# Altium PCB DSS2_CAN.PcbDoc
Units mil, origin at the board's own origin, x right, y up, seen from the top; angles counter-clockwise.
Board outline 3937.01 x 3149.61 mil, 2 copper layers (Top Layer, Bottom Layer), stack 61.811 mil thick; 30 components, 19 nets, 125 pads, 15 vias.
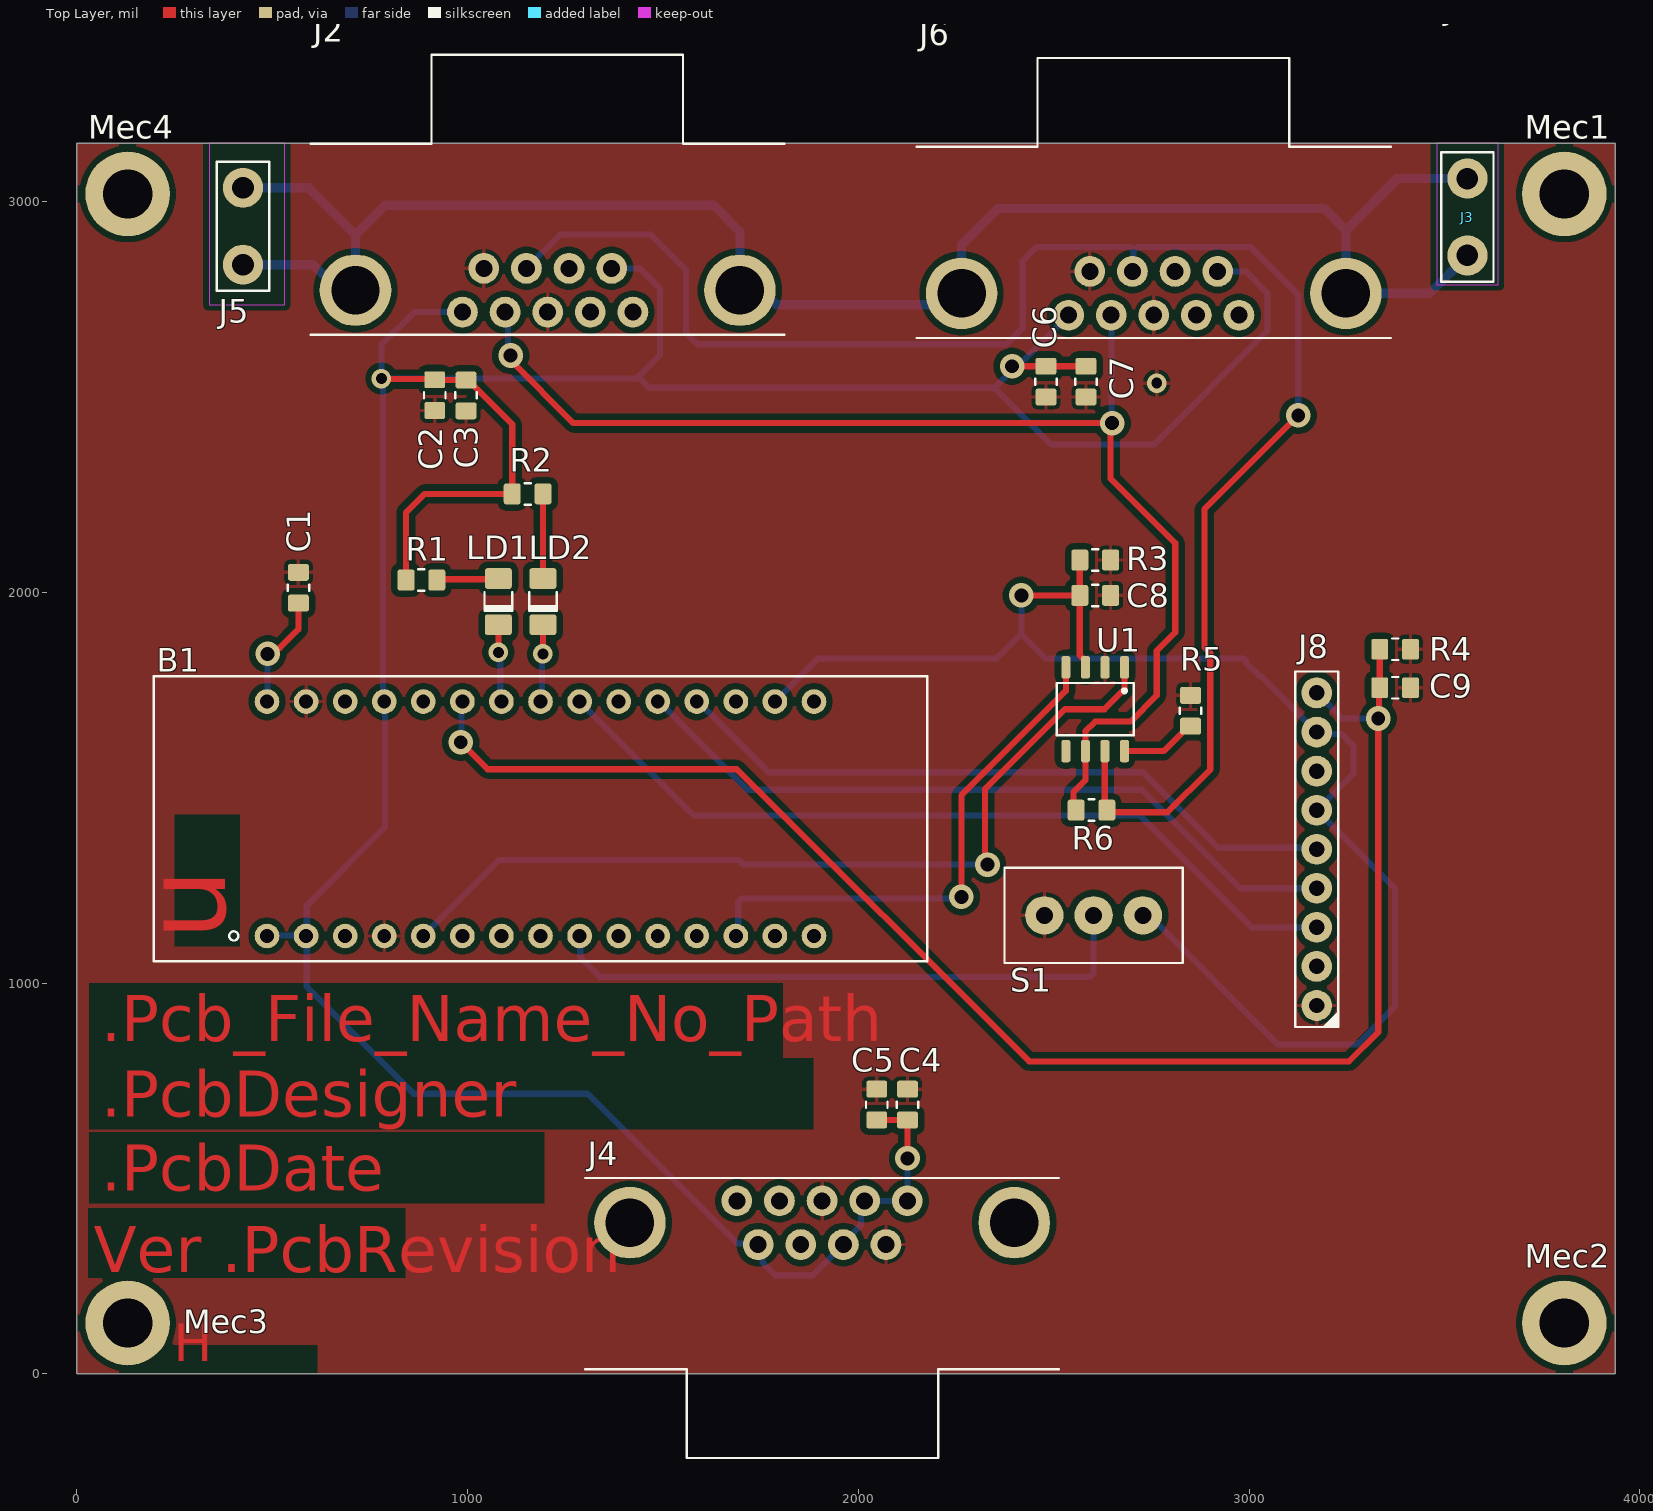
[diagram p0: Top Layer view]
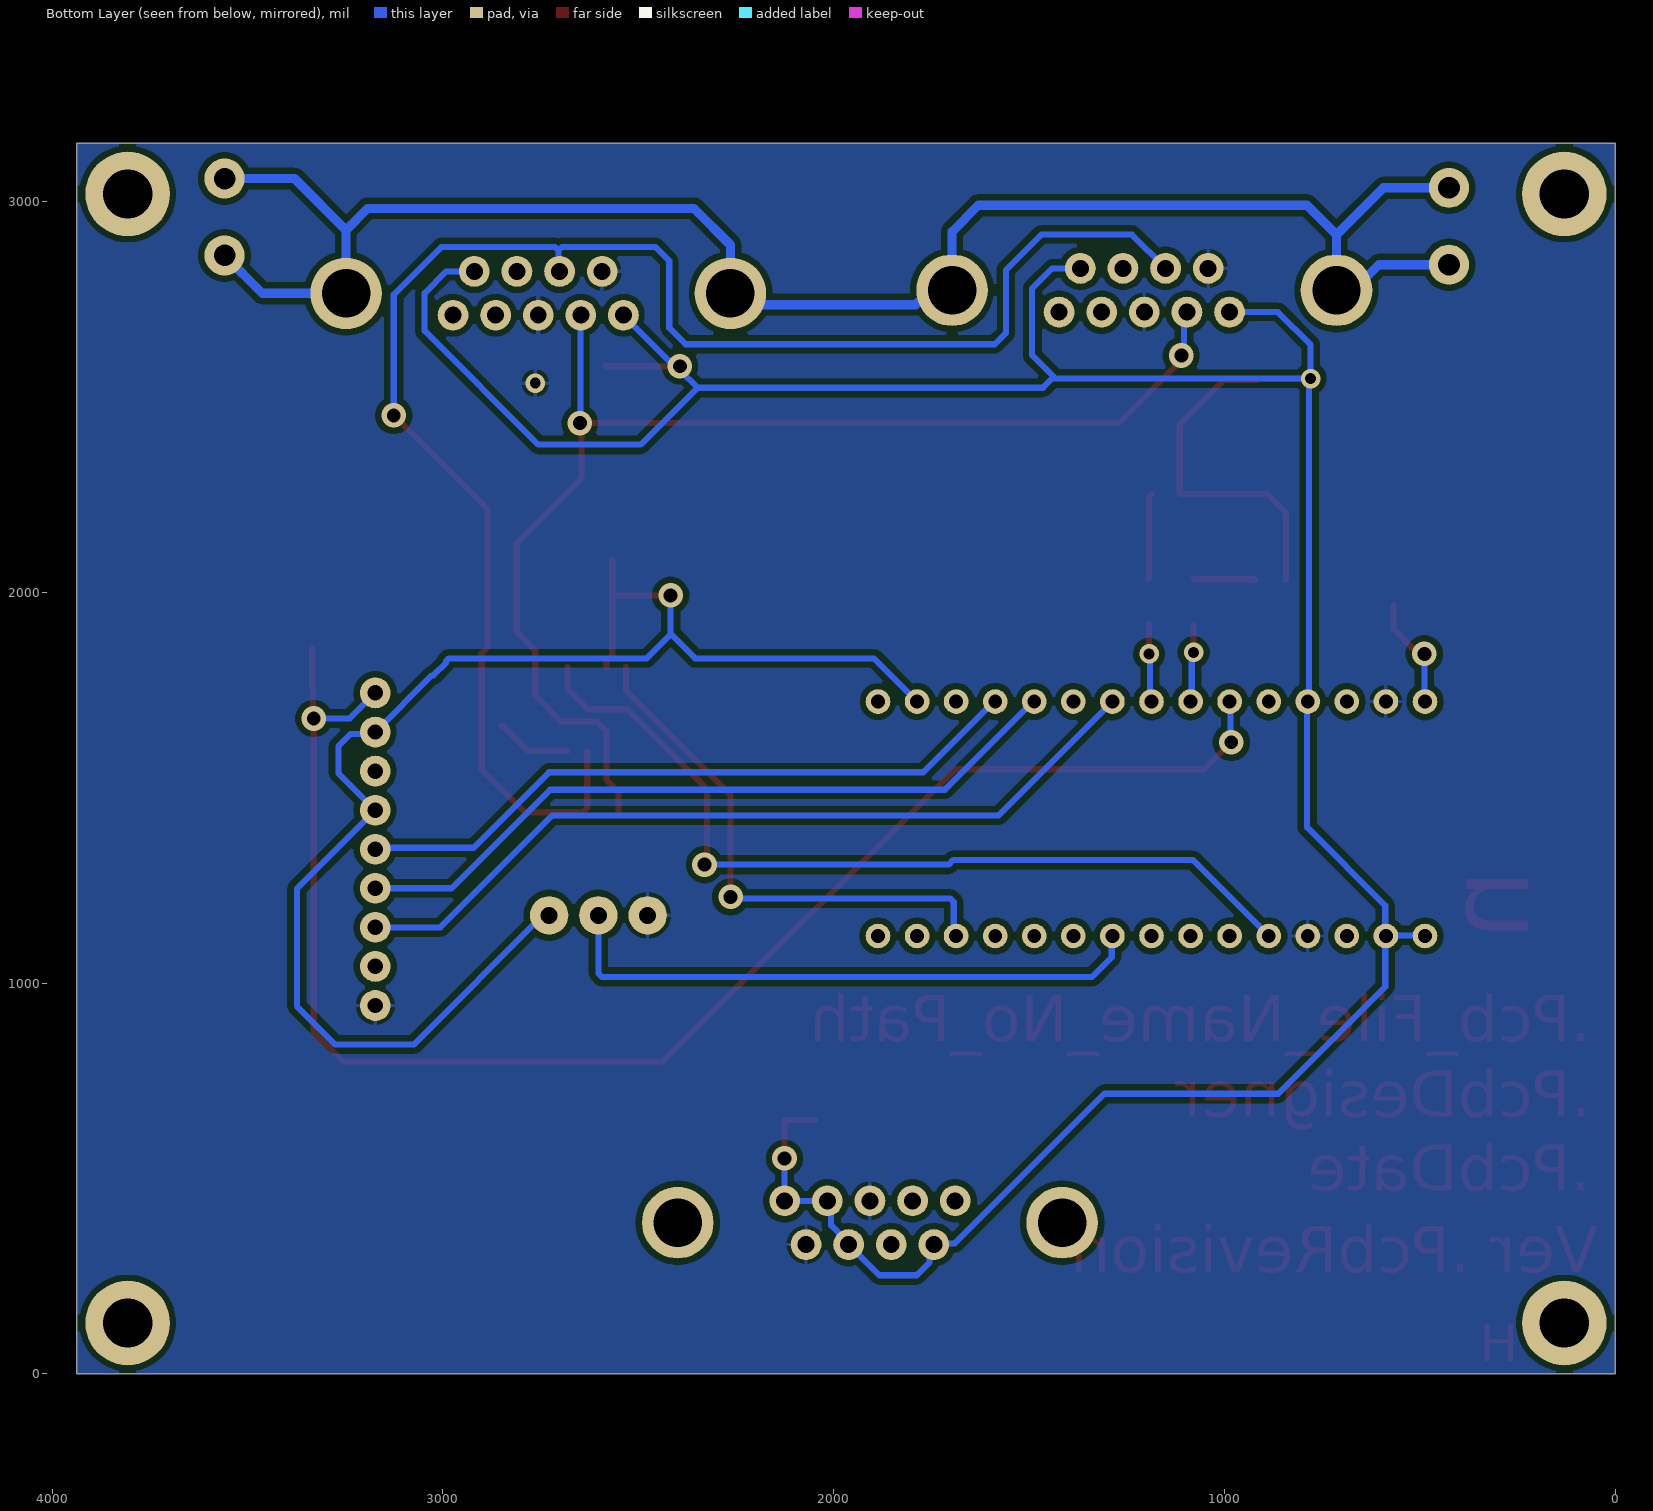
[diagram p1: Bottom Layer view, seen from below]

## Layer stack, top to bottom
Top Layer: signal copper 1.378
Dielectric 1: core 59.0551, FR-4, Dk 4.2
Bottom Layer: signal copper 1.378

## Board outline
0,0 0,3149.61 3937.01,3149.61 3937.01,0

## Design rules (kind name [scope] priority, off if disabled: settings)
AcuteAngle [All] p1: minimum=9.00000000000000E+0001 checktracksonly=TRUE
AssemblyTestPointUsage [All] p1 off:
AssemblyTestpoint [All] p1 off: testpointundercomponent=TRUE minsize=40 maxsize=100 preferedsize=60 minholesize=0 maxholesize=40 preferedholesize=32 testpointgrid=1 usegrid=TRUE gridtolerance=0.01 allowsidetop=TRUE allowsidebottom=TRUE
BoardOutlineClearance [All] p1 off: gap=9.84 ignorepadtopadclearanceinfootprint=FALSE
Clearance [All] p1: gap=15.75 ignorepadtopadclearanceinfootprint=FALSE
ComponentClearance [All] p1 off: gap=9.84 collisioncheckmode=3 verticalgap=9.84 showdistances=FALSE
DiffPairsRouting [All] p1 off: maxlimit=10 minlimit=10 mostfreqgap=10 toplayer_minwidth=15 toplayer_maxwidth=15 toplayer_prefwidth=15 bottomlayer_minwidth=15 bottomlayer_maxwidth=15 bottomlayer_prefwidth=15 maxuncoupledlength=500
FabricationTestPointUsage [All] p1 off: valid=0 allowmultiple=FALSE
FabricationTestpoint [All] p1 off: side=3 testpointundercomponent=TRUE minsize=40 maxsize=100 preferedsize=60 minholesize=0 maxholesize=40 preferedholesize=32 testpointgrid=1 allowsidetop=TRUE allowsidebottom=TRUE usegrid=TRUE gridtolerance=0.01
FanoutControl Fanout_BGA [IsBGA] p1 off: bgadir=Out bgaviamode=Centered fanoutstyle=Auto fanoutdirection=Alternating viagrid=1 // Fanout_BGA (Default Rule)
FanoutControl Fanout_LCC [IsLCC] p2 off: bgadir=Out bgaviamode=Centered fanoutstyle=Auto fanoutdirection=Alternating viagrid=1 // Fanout_LCC (Default Rule)
FanoutControl Fanout_SOIC [IsSOIC] p3 off: bgadir=Out bgaviamode=Centered fanoutstyle=Auto fanoutdirection=Alternating viagrid=1 // Fanout_SOIC (Default Rule)
FanoutControl Fanout_Small [(CompPinCount < 5)] p4 off: bgadir=Out bgaviamode=Centered fanoutstyle=Auto fanoutdirection=OutThenIn viagrid=1 // Fanout_Small (Default Rule)
FanoutControl Fanout_Default [All] p5 off: bgadir=Out bgaviamode=Centered fanoutstyle=Auto fanoutdirection=Alternating viagrid=1 // Fanout_Default (Default Rule)
Height [All] p1 off: minheight=0 maxheight=1000 prefheight=500
HoleSize [All] p1 off: absolutevalues=TRUE maxlimit=118.11 minlimit=5.91 maxpercent=80.000 minpercent=20.000
HoleToHoleClearance [All] p1 off: gap=9.84 allowstackedmicrovias=TRUE
LayerPairs [All] p1 off: enforce=TRUE
MinimumAnnularRing [All] p1 off: minimumring=13.78
MinimumSolderMaskSliver [All] p1 off: minsoldermaskwidth=0
PasteMaskExpansion [All] p1 off: expansion=0
PlaneClearance [All] p1: clearance=9.84
PlaneConnect [All] p1 off: planeconnectstyle=Relief reliefexpansion=19.68 reliefentries=4 reliefconductorwidth=9.84 reliefairgap=9.84
PolygonConnect [All] p1: connectstyle=Relief reliefconductorwidth=9.84 reliefentries=4 polygonreliefangle="90 Angle" airgapwidth=9.84
RoutingCorners [All] p1 off: cornerstyle=45-Degree minsetback=98.43 maxsetback=98.43
RoutingLayers [All] p1 off: top layer_v5=TRUE bottom layer_v5=TRUE
RoutingPriority [All] p1 off: routingpriority=0
RoutingTopology [All] p1 off: topology=Shortest
RoutingVias [All] p1: holewidth=35.43 width=62.99 viastyle="Through Hole" minholewidth=35.43 minwidth=62.99 maxholewidth=35.43 maxwidth=62.99
SilkToBoardRegionClearance [All] p1 off:
SilkToSilkClearance [All] p1 off: silktosilkclearance=0
SilkToSolderMaskClearance [IsPad] p1 off: minsilkscreentomaskgap=0 clearancetoexposedcopper=TRUE
SolderMaskExpansion [All] p1 off: expansion=0 istentingtop=FALSE
Width [All] p1: maxlimit=157.48 minlimit=7.87 preferedwidth=15.75
4 further rules are at their usual default settings.

## Components (designator, comment, footprint, x,y, rotation, side; value= is the part's Value field where it differs from the comment)
B1 "NUCLEO-L432KC Socket" "NUCLEO-L432KC Socket" 1886.61,1120.47 r90 top
C1 "100nF" "CAPACITOR 2012 REFLOW" 566.93,2011.81 r90 top
C2 "10uF" "CAPACITOR 2012 REFLOW" 915.75,2504.72 r90 top
C3 "100nF" "CAPACITOR 2012 REFLOW" 996.06,2503.94 r90 top
C4 "10uF" "CAPACITOR 2012 REFLOW" 2125.98,688.98 r270 top
C5 "100nF" "CAPACITOR 2012 REFLOW" 2047.24,688.98 r270 top
C6 "10uF" "CAPACITOR 2012 REFLOW" 2480.32,2539.37 r90 top
C7 "100nF" "CAPACITOR 2012 REFLOW" 2582.68,2539.37 r90 top
C8 "100nF" "CAPACITOR 2012 REFLOW" 2606.3,1992.13 r0 top
C9 "100nF" "CAPACITOR 2012 REFLOW" 3374.02,1755.91 r180 top
J2 "*" "D-SUB 9 FEM RND 205-00769" 1205.04,2773.2 r90 top
J3 "3867B.68" "FASTON 6.3mm P5.0" 3559.06,2960.63 r270 top
J4 "*" "D-SUB 9 FEM RND 205-00769" 1907.28,386.61 r270 top
J5 "3867B.68" "FASTON 6.3mm P5.0" 425.2,2937.01 r270 top
J6 "*" "D-SUB 9 FEM RND 205-00769" 2756.23,2765.33 r90 top
J8 "*" "PinHeader1x9 P2.54" 3173.23,1342.52 r90 top
LD1 "*" "LED 3216 REFLOW" 1078.74,1976.38 r90 top
LD2 "*" "LED 3216 REFLOW" 1192.91,1976.38 r90 top
Mec1 "*" "Screw M3X5 Connected" 3807.09,3019.68 r0 top
Mec2 "*" "Screw M3X5 Connected" 3807.09,129.92 r0 top
Mec3 "*" "Screw M3X5 Connected" 129.92,129.92 r0 top
Mec4 "*" "Screw M3X5 Connected" 129.92,3019.68 r0 top
R1 "100R" "RESISTOR 2012 REFLOW" 881.89,2031.5 r180 top
R2 "100R" "RESISTOR 2012 REFLOW" 1153.54,2251.97 r180 top
R3 "100k" "RESISTOR 2012 REFLOW" 2606.3,2082.68 r180 top
R4 "100k" "RESISTOR 2012 REFLOW" 3374.02,1854.33 r180 top
R5 "0R" "RESISTOR 2012 REFLOW" 2850.39,1696.85 r270 top
R6 "NC(120)" "RESISTOR 2012 REFLOW" 2596.8,1442.57 r0 top
S1 "*" "SLIDE SWITCH Knitter MFP120" 2602.36,1173.23 r180 top
U1 "MAX3051ESA" "SO8 P1.27 C4.0X5.0 H1.75" 2606.3,1700.79 r270 top

## Footprints (in the part's own frame and the unit in brackets; to place one, negate y for a bottom-side part, rotate by r counter-clockwise, add the part's x,y. Pads: shape width x height; smd on the part's side, far side on the other; paste and mask are expansions set on the pad)
"CAPACITOR 2012 REFLOW" [mm] "Capacitor SMD 2.0x1.2mm (0805-imperial)"
  rrect25% 1.1x1.35 smd: 1(-1,0) 2(1,0)
  silkscreen extent -0.2,-0.7 0.2,0.7, body extent -1,-0.6 1,0.6, height 1
"D-SUB 9 FEM RND 205-00769" [mm] "RND 205-00769"
  round 2 hole 1.1: 1(-1.42,5.54) 2(-1.42,2.77) 3(-1.42,0) 4(-1.42,-2.77) 5(-1.42,-5.54) 6(1.42,4.155) 7(1.42,1.385) 8(1.42,-1.385) 9(1.42,-4.155)
  round 4.65 hole 3.15: 10(0,12.495) 11(0,-12.495)
  silkscreen extent -2.9,-15.4 15.3,15.4, body extent -2.9,-15.39 15.3,15.41, height 12.69
"FASTON 6.3mm P5.0" [mm] "Faston Vogt 3867B.68 6.3mm P5.0"
  round 2.6 hole 1.4: 1(-2.5,0) 1(2.5,0)
  silkscreen extent -4.2,-1.7 4.2,1.7, body extent -12.1,-0.4 4,0.4, height 9
"LED 3216 REFLOW" [mm] "LED SMD 3.2x1.6mm (1206-imperial)"
  rrect25% 1.35x1.75 smd: 1(-1.5,0) 2(1.5,0)
  silkscreen extent -0.6,-0.9 0.6,0.9, body extent -1.7,-0.9 1.7,0.9, height 1.1
"NUCLEO-L432KC Socket" [mm] "ARM Cortex based board"
  round 1.6 hole 0.9: 1(0,35.56) 2(0,33.02) 3(0,30.48) 4(0,27.94) 5(0,25.4) 6(0,22.86) 7(0,20.32) 8(0,17.78) 9(0,15.24) 10(0,12.7) 11(0,10.16) 12(0,7.62) 13(0,5.08) 14(0,2.54) 15(0,0) 16(15.24,0) 17(15.24,2.54) 18(15.24,5.08) 19(15.24,7.62) 20(15.24,10.16) 21(15.24,12.7) 22(15.24,15.24) 23(15.24,17.78) 24(15.24,20.32) 25(15.24,22.86) 26(15.24,25.4) 27(15.24,27.94) 28(15.24,30.48) 29(15.24,33.02) 30(15.24,35.56)
  silkscreen extent -1.65,-7.37 16.89,42.93, body extent -1.27,-1.27 16.51,36.83, height 7.01
"PinHeader1x9 P2.54" [mm] "Plug connector"
  round 2 hole 1: 1(-10.16,0) 2(-7.62,0) 3(-5.08,0) 4(-2.54,0) 5(0,0) 6(2.54,0) 7(5.08,0) 8(7.62,0) 9(10.16,0)
  silkscreen extent -11.56,-1.4 11.56,1.4, body extent -11.43,-1.27 11.43,1.27, height 8.5
"RESISTOR 2012 REFLOW" [mm] "Resistor SMD 2.0x1.2mm (0805-imperial)"
  rrect25% 1.1x1.35 smd: 1(-1,0) 2(1,0)
  silkscreen extent -0.2,-0.7 0.2,0.7, body extent -1,-0.63 1,0.63, height 0.45
"Screw M3X5 Connected" [mm] "Standard Screw M3X5 Connected BN330"
  round 5.5 hole 3.2 paste-2539.97 mask+0: 1(0,0)
  body extent -2.75,-2.75 2.75,2.75, height 2.02
"SLIDE SWITCH Knitter MFP120" [mm] "Slide Switch Knitter-Switch type MFP120"
  round 2.5 hole 1.1: 1(-3.2,0) 2(0,0) 3(3.2,0)
  silkscreen extent -5.8,-3.1 5.8,3.1, body extent -5.5,-2.8 5.5,2.8, height 10
"SO8 P1.27 C4.0X5.0 H1.75" [mm] "8-Pin Small Outline Integrated Circuit 1.27 mm Pitch, IPC Medium Density"
  rrect50% 1.45x0.6 smd: 1(-2.725,1.905) 2(-2.725,0.635) 3(-2.725,-0.635) 4(-2.725,-1.905) 5(2.725,-1.905) 6(2.725,-0.635) 7(2.725,0.635) 8(2.725,1.905)
  silkscreen extent -1.7,-2.5 1.7,2.5, body extent -3,-2.45 3,2.45, height 1.75

## Part data
B1: "ARM Cortex based board"
C1 C2 C3 C4 C5 C6 C7 C8 C9: library part Capacitor, "Capacitor"
J2 J4 J6: library part "D-SUB 9 FEM GROUNDED", "D-Subminiature 9 way Socket Right Angle"
J3 J5: library part "FASTON 6.3mm P5.0", "Faston Right angle Vogt 3867B.68"
J8: library part PinHeader1x9, "Plug connector"
LD1 LD2: library part LED, "LED generic"
Mec1 Mec2 Mec3 Mec4: library part "Screw Connected", "Screw Connected BN330"
R1 R2 R3 R4 R5 R6: library part Resistor, "Resistor"
S1: library part "Slide Switch 1Pole ON-ON", "Slide Switch 1Pole ON-ON"
U1: "+3.3V, 1Mbps, Low-Supply-Current CAN Transceiver"

## Via types
v1: diameter 62.99, hole 35.43, Top Layer to Bottom Layer, 11 vias
v2: diameter 50, hole 28, Top Layer to Bottom Layer, 4 vias

## Nets (pads, with @x,y where several pads share a name; then routed paths per layer and width w, separated by ;. In a path a pad name is that pad's centre, name@x,y a point inside that pad or via, vN(x,y) a via of type N, cw(c..) or ccw(c..) an arc to the next point about the centre after c; other vN are vias at no path point)
+3V3: B1.17 C8.1 J8.6 J8.8 R3.2 S1.1 U1.3 | length 3811.9
  Top Layer w15.75: v1(2417.32,1992.13) C8.1 ; R3.2 C8.1 ; U1.3 2581.3,1824.8 2566.93,1839.17 C8.1
  Bottom Layer w15.75: B1.17@1788.19,1722.05 1896.85,1830.71 2354.33,1830.71 2415.9,1892.27 2417.32,1892.27 ; v1(2417.32,1992.13) 2417.32,1892.27 ; S1.1 2744.09,1173.23 3074.8,842.52 3275.59,842.52 3374.02,940.94 3374.02,1241.73 J8.6 3267.72,1537.01 3267.72,1606.3 3236.22,1637.8 3177.95,1637.8 J8.8 3028.35,1787.4 3024.41,1787.4 2992.13,1819.69 2992.13,1823.62 2985.04,1830.71 2478.89,1830.71 2417.32,1892.27
CANH: J2.7 J6.7 R6.2 U1.7 | length 4327.9
  Top Layer w15.75: U1.7@2632.58,1592.22 U1.7 2630.61,1592.81 2630.61,1448.13 2641.73,1437.01 2791.34,1437.01 2900.59,1546.26 2900.59,1844.49 2885.83,1859.25 2885.83,2212.6 v1(3125.98,2452.76)
  Bottom Layer w15.75: J2.7 1237.13,2915.72 1468.23,2915.72 1558.78,2825.17 1558.78,2663.76 1587.6,2634.94 2379.03,2634.94 2420.99,2676.89 2420.99,2848.8 2456.42,2884.23 2695.23,2884.23 2704.45,2875 ; J6.7 2704.45,2823.99 2704.45,2875 ; v1(3125.98,2452.76) 3125.98,2761.91 3003.67,2884.23 2713.68,2884.23 2704.45,2875
CANL: J2.2 J6.2 R6.1 U1.6 | length 3239.7
  Top Layer w15.75: v1(1110.24,2606.3) 1110.24,2593.51 1270.68,2433.07 v1(2649.61,2433.07) 2645.67,2429.13 2645.67,2291.34 2811.02,2125.98 2811.02,1897.64 2763.78,1850.39 2763.78,1736.22 2696.85,1669.29 2606.3,1669.29 2581.3,1644.29 U1.6 2581.3,1519.49 2551.18,1489.37 R6.1@2551.18,1437.01
  Bottom Layer w15.75: J2.2 1103.11,2710.18 1103.11,2613.42 v1(1110.24,2606.3) ; J6.2 2648.39,2708.21 2648.39,2434.29 v1(2649.61,2433.07)
CHG_BUTTON: B1.9 S1.2 | length 1552.8
  Bottom Layer w15.75: B1.9@1288.19,1122.05 1288.19,1066.14 1338.58,1015.75 2593.14,1015.75 2602.37,1024.98 2602.37,1149.6 2590.55,1161.42 S1.2
EARTH: J2.10 J2.11 J3.1 J5.1 J6.10 J6.11 | length 4630
  Bottom Layer w23.62: J5.1@425.2,2838.58 604.59,2838.58 669.97,2773.2 J2.10 713.12,2915.19 ; J5.1@425.2,3035.43 592.87,3035.43 713.12,2915.19 ; J3.1@3559.06,2862.2 3462.18,2765.33 J6.11 3248.15,2927.14 ; J3.1@3559.06,3059.06 3380.07,3059.06 3248.15,2927.14 ; 713.12,2915.19 788.45,2990.53 1629.65,2990.53 1696.97,2923.21 J2.11 1727.48,2742.7 1784.06,2742.7 1790.54,2736.22 2235.19,2736.22 J6.10 2264.3,2888.95 2358,2982.65 3192.64,2982.65 3248.15,2927.14
GEAR_SEL: B1.22 J8.3 | length 2126
  Bottom Layer w15.75: B1.22 1577.95,1429.13 2720.47,1429.13 3007.09,1142.52 J8.3
GND: B1.4 B1.29 C1.2 C2.1 C3.1 C4.1 C5.1 C6.1 C7.1 C8.2 C9.1 J2.3 J2.6 J4.3 J4.6 J6.3 J6.6 J8.1 R3.1 R4.1 R5.1 S1.3 U1.2
  other v2: 2763.78,2535.43
NetB1_23: B1.23 LD2.1 | length 197.2
  Top Layer w15.75: v2(1192.91,1842.52) LD2.1
  Bottom Layer w15.75: B1.23@1188.19,1722.05 1190.55,1724.41 1190.55,1840.16 v2(1192.91,1842.52)
NetB1_24: B1.24 LD1.1 | length 199.2
  Top Layer w15.75: v2(1078.74,1846.46) LD1.1
  Bottom Layer w15.75: v2(1078.74,1846.46) 1083.46,1841.73 1083.46,1726.77 B1.24@1088.19,1722.05
NetB1_30: B1.30 C1.1 | length 288.3
  Top Layer w15.75: v1(488.19,1842.52) 500.97,1842.52 516.33,1857.87 519.29,1857.87 566.93,1905.51 C1.1@566.93,1968.5
  Bottom Layer w15.75: B1.30@488.19,1722.05 v1(488.19,1842.52)
NetLD1_2: LD1.2 R1.1 | length 159.1
  Top Layer w15.75: R1.1 923.23,2033.47 1076.77,2033.47 LD1.2
NetLD2_2: LD2.2 R2.1 | length 222.6
  Top Layer w15.75: R2.1@1185.04,2251.97 1192.91,2244.1 LD2.2 LD2.2@1194.88,2037.4
NetR5_2: R5.2 U1.8 | length 195.6
  Top Layer w15.75: U1.8 2781.5,1593.5 2845.47,1657.48 R5.2
P_BUTTON: B1.25 C9.2 J8.9 R4.2 | length 3990.4
  Top Layer w15.75: v1(982.28,1616.14) 1051.18,1547.24 1688.98,1547.24 2437.01,799.21 3255.91,799.21 3330.71,874.02 v1(3330.71,1677.17) 3332.68,1679.13 3332.68,1753.94 C9.2 R4.2
  Bottom Layer w15.75: v1(982.28,1616.14) 984.45,1618.31 984.45,1718.31 B1.25 ; J8.9 3238.58,1677.17 v1(3330.71,1677.17)
RXD: B1.13 U1.4 | length 1361.9
  Top Layer w15.75: v1(2263.78,1220.47) 2263.78,1480.31 2531.3,1747.83 U1.4
  Bottom Layer w15.75: B1.13@1688.19,1122.05 1692.91,1126.77 1692.91,1207.31 1702.14,1216.54 2259.84,1216.54 v1(2263.78,1220.47)
SCL: B1.1 B1.2 B1.27 C2.2 C3.2 C4.2 C5.2 C6.2 C7.2 J2.1 J2.9 J4.1 J4.2 J4.7 J4.9 J6.1 J6.9 R1.2 R2.2 | length 8916.2
  Top Layer w15.75: v2(779.53,2547.24) 781.11,2545.67 914.17,2545.67 C2.2 916.14,2543.7 1000.59,2543.7 1114.17,2430.12 R2.2 889.76,2251.97 842.52,2204.72 R1.2 ; C5.2 C4.2 v1(2125.98,551.18) ; v1(2393.7,2578.74) C6.2 C7.2
  Bottom Layer w15.75: B1.1@488.19,1122.05 B1.2@588.19,1122.05 ; J2.1 862.97,2717.3 779.53,2633.86 v2(779.53,2547.24) ; J2.9 1440.69,2829.11 1492.13,2777.68 1492.13,2606.3 1437.01,2551.18 1464.57,2523.62 2348.37,2523.62 ; 1440.94,2547.24 v2(779.53,2547.24) ; v1(2125.98,551.18) 2125.69,550.89 2125.69,442.82 J4.1 J4.2 2006.49,432.68 2006.49,379.53 1961.81,334.84 J4.7 1883.07,251.97 1787.4,251.97 1754.98,284.39 1754.98,319.43 J4.9 1740.72,333.69 1689.93,333.69 1307.09,716.54 862.2,716.54 588.19,990.55 B1.2@588.19,1122.05 ; v1@2393.7,2568.95 2348.37,2523.62 ; v1(2393.7,2578.74) 2402.74,2587.78 2416.47,2587.78 J6.1 ; J6.9 2991.86,2821.24 3046.97,2766.12 3046.97,2669.02 2755.91,2377.95 2494.04,2377.95 2348.37,2523.62 ; B1.2@588.19,1122.05 588.19,1198.43 788.19,1398.43 788.19,1720.47 783.07,1725.59 783.07,2543.7 v2(779.53,2547.24)
TXD: B1.5 U1.1 | length 2242.4
  Top Layer w15.75: v1(2330.71,1303.15) 2323.88,1309.98 2323.88,1495.88 2528.79,1700.79 2629.92,1700.79 2681.3,1752.17 U1.1
  Bottom Layer w15.75: B1.5@888.19,1122.05 1081.1,1314.96 1693.61,1314.96 1705.42,1303.15 v1(2330.71,1303.15)
X-AXIS: B1.19 J8.5 | length 1742.2
  Bottom Layer w15.75: B1.19@1588.19,1722.05 1770.87,1539.37 2728.35,1539.37 2921.26,1346.46 3169.29,1346.46 J8.5
Y-AXIS: B1.20 J8.4 | length 1883.7
  Bottom Layer w15.75: B1.20@1488.19,1722.05 1715.47,1494.76 2725.71,1494.76 2977.95,1242.52 J8.4
pads on no net: B1.3 B1.6 B1.7 B1.8 B1.10 B1.11 B1.12 B1.14 B1.15 B1.16 B1.18 B1.21 B1.26 B1.28 J2.4 J2.5 J2.8 J4.4 J4.5 J4.8 J4.10 J4.11 J6.4 J6.5 J6.8 J8.2 J8.7 Mec1.1 Mec2.1 Mec3.1 Mec4.1 U1.5

## Polygon pours and split planes (outlines as drawn)
GND on Top Layer "GND_L01_P001" (solid, pour order 1): 3937.01,3149.61 3937.01,0 0,0 0,3149.61
GND on Bottom Layer "GND_L02_P000" (solid, pour order 0): 0,3149.61 3937.01,3149.61 3937.01,0 0,0

## Keep-outs
Top Layer:
  rectangle: 338.58,2736.22 531.5,3149.61
  rectangle: 3480.32,2787.4 3637.8,3149.61

## Other copper
Top Layer:
  text "u" at 448.56,1109.24 h359.94 r90
  text ".Pcb_File_Name_No_Path" at 62.99,850.39 h118.11
  text ".PcbDesigner" at 62.99,657.48 h118.11
  text ".PcbDate" at 62.99,468.5 h118.11
  text "Ver .PcbRevision" at 43.31,259.84 h118.11
  text "H" at 248.03,0 h164.64

## Silkscreen, mask and mechanical layers (free items; w line width, h text height)
Mechanical 1:
  the board outline again, w5.91
Drill Drawing:
  circle w10: c-503.3,4330.58 r33.33
  lines w10: -536.63,4147.24 -503.3,4163.91 -469.97,4147.24 -486.63,4180.58 -469.97,4213.91 -503.3,4197.24 -536.63,4213.91 -519.97,4180.58 -536.63,4147.24 ; -536.63,4447.24 -536.63,4463.91 -519.97,4480.58 -536.63,4497.24 -536.63,4513.91 -519.97,4513.91 -503.3,4497.24 -486.63,4513.91 -469.97,4513.91 -469.97,4497.24 -486.63,4480.58 -469.97,4463.91 -469.97,4447.24 -486.63,4447.24 -503.3,4463.91 -519.97,4447.24 -536.63,4447.24 ; -536.63,4663.91 -469.97,4663.91 -503.3,4597.24 -536.63,4663.91 ; -536.63,4763.91 -519.97,4763.91 -519.97,4747.24 -486.63,4747.24 -486.63,4763.91 -469.97,4763.91 -469.97,4797.24 -486.63,4797.24 -486.63,4813.91 -519.97,4813.91 -519.97,4797.24 -536.63,4797.24 -536.63,4763.91 ; -536.63,4897.24 -469.97,4897.24 -469.97,4963.91 -536.63,4963.91 -536.63,4897.24 ; -536.63,5080.58 -503.3,5047.24 -469.97,5080.58 -503.3,5113.91 -536.63,5080.58
  lines w15: -596.42,4102.24 10214.57,4102.24 ; -596.42,5152.24 10214.57,5152.24 ; -45.55,3952.24 -45.55,5302.24 ; 494.31,3952.24 494.31,5302.24 ; 1643.98,3952.24 1643.98,5302.24 ; 2149.85,3952.24 2149.85,5302.24 ; 2883.65,3952.24 2883.65,5302.24 ; 4383.2,3952.24 4383.2,5302.24 ; 4973.05,3952.24 4973.05,5302.24 ; 5718.85,3952.24 5718.85,5302.24 ; 6648.59,3952.24 6648.59,5302.24 ; 7502.35,3952.24 7502.35,5302.24 ; 8835.96,3952.24 8835.96,5302.24 ; -596.42,3952.24 10214.57,3952.24 10214.57,5302.24 -596.42,5302.24 -596.42,3952.24
  text "Symbol" at -506.42,5197.24 h72
  text "Count" at -0.55,5197.24 h72
  text "Hole Size" at 539.31,5197.24 h72
  text "Plated" at 1688.98,5197.24 h72
  text "Hole Type" at 2194.85,5197.24 h72
  text "Drill Layer Pair" at 2928.65,5197.24 h72
  text "Via/Pad" at 4428.2,5197.24 h72
  text "Pad Shape" at 5018.05,5197.24 h72
  text "Template" at 5763.85,5197.24 h72
  text "Description" at 6693.59,5197.24 h72
  text "Hole Tolerance (+)" at 7547.35,5197.24 h72
  text "Hole Tolerance (-)" at 8880.96,5197.24 h72
  text "4" at -0.55,5047.24 h60
  text "0.711mm (28.00mil)" at 539.31,5047.24 h60
  text "PTH" at 1688.98,5047.24 h60
  text "Round" at 2194.85,5047.24 h60
  text "Top Layer - Bottom Layer" at 2928.65,5047.24 h60
  text "Via" at 4428.2,5047.24 h60
  text "Rounded" at 5018.05,5047.24 h60
  text "v127h71" at 5763.85,5047.24 h60
  text "4" at -0.55,4897.24 h60
  text "1.400mm (55.12mil)" at 539.31,4897.24 h60
  text "PTH" at 1688.98,4897.24 h60
  text "Round" at 2194.85,4897.24 h60
  text "Top Layer - Bottom Layer" at 2928.65,4897.24 h60
  text "Pad" at 4428.2,4897.24 h60
  text "Rounded" at 5018.05,4897.24 h60
  text "c260h140" at 5763.85,4897.24 h60
  text "4" at -0.55,4747.24 h60
  text "3.200mm (125.98mil)" at 539.31,4747.24 h60
  text "PTH" at 1688.98,4747.24 h60
  text "Round" at 2194.85,4747.24 h60
  text "Top Layer - Bottom Layer" at 2928.65,4747.24 h60
  text "Pad" at 4428.2,4747.24 h60
  text "Rounded" at 5018.05,4747.24 h60
  text "c550h320m550p0" at 5763.85,4747.24 h60
  text "6" at -0.55,4597.24 h60
  text "3.150mm (124.02mil)" at 539.31,4597.24 h60
  text "PTH" at 1688.98,4597.24 h60
  text "Round" at 2194.85,4597.24 h60
  text "Top Layer - Bottom Layer" at 2928.65,4597.24 h60
  text "Pad" at 4428.2,4597.24 h60
  text "Rounded" at 5018.05,4597.24 h60
  text "c465h315" at 5763.85,4597.24 h60
  text "9" at -0.55,4447.24 h60
  text "1.000mm (39.37mil)" at 539.31,4447.24 h60
  text "PTH" at 1688.98,4447.24 h60
  text "Round" at 2194.85,4447.24 h60
  text "Top Layer - Bottom Layer" at 2928.65,4447.24 h60
  text "Pad" at 4428.2,4447.24 h60
  text "Rounded" at 5018.05,4447.24 h60
  text "c200h100" at 5763.85,4447.24 h60
  text "30" at -0.55,4297.24 h60
  text "1.100mm (43.31mil)" at 539.31,4297.24 h60
  text "PTH" at 1688.98,4297.24 h60
  text "Round" at 2194.85,4297.24 h60
  text "Top Layer - Bottom Layer" at 2928.65,4297.24 h60
  text "Pad" at 4428.2,4297.24 h60
  text "Rounded" at 5018.05,4297.24 h60
  text "(Mixed)" at 5763.85,4297.24 h60
  text "41" at -0.55,4147.24 h60
  text "0.900mm (35.43mil)" at 539.31,4147.24 h60
  text "PTH" at 1688.98,4147.24 h60
  text "Round" at 2194.85,4147.24 h60
  text "Top Layer - Bottom Layer" at 2928.65,4147.24 h60
  text "(Mixed)" at 4428.2,4147.24 h60
  text "Rounded" at 5018.05,4147.24 h60
  text "(Mixed)" at 5763.85,4147.24 h60
  text "98 Total" at -0.55,3997.24 h60